# EAGLE board Qwiic_IMU_Bonobo (EAGLE 9.6.2)
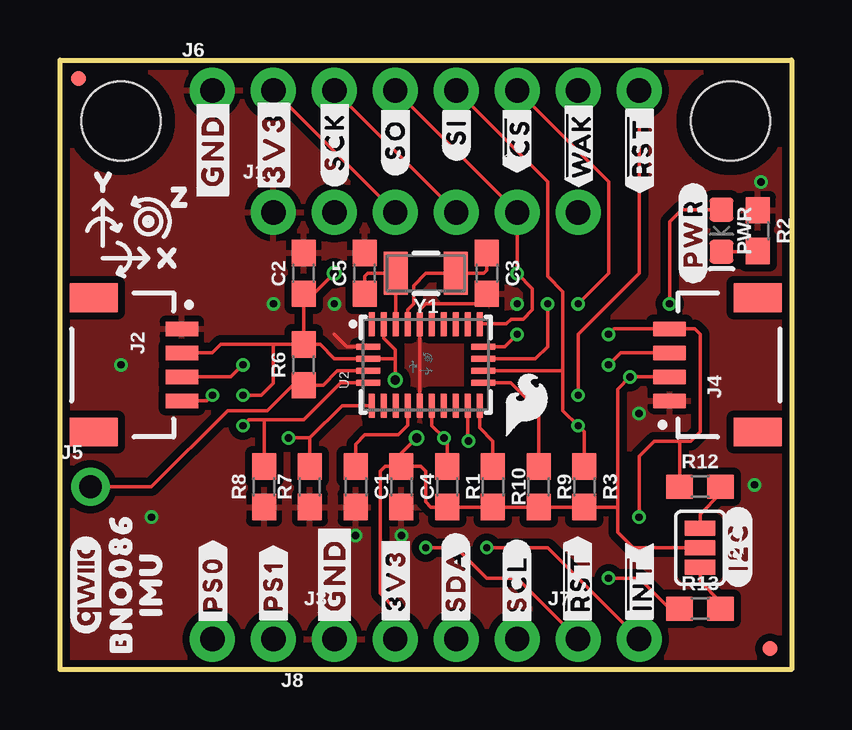
[diagram p0: board, top side]
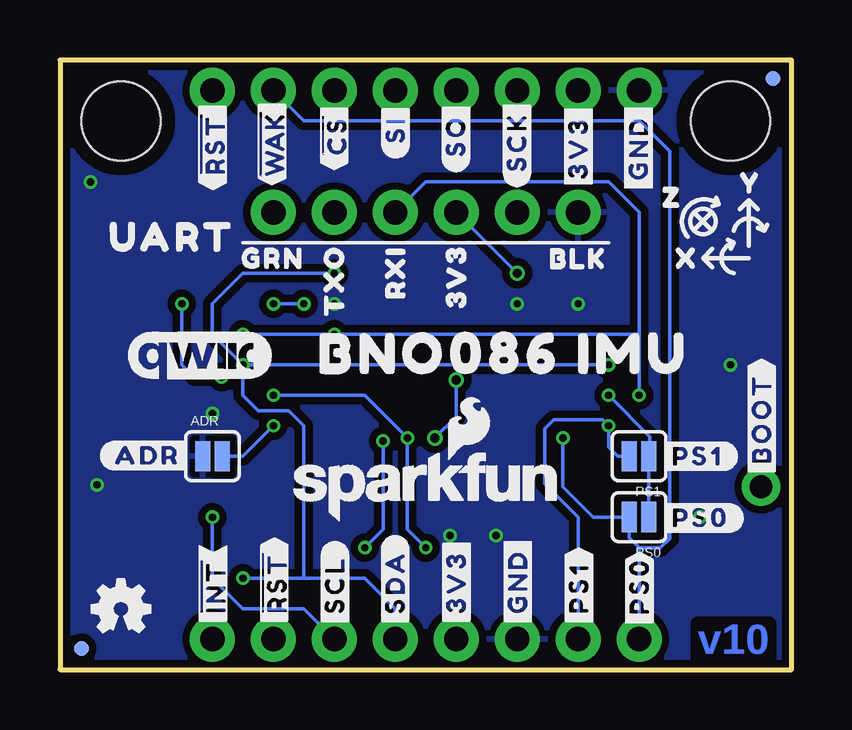
[diagram p1: board, bottom side, seen from below]

Size 30.48 x 25.4 mm. Coordinates in mm from the lower left corner, seen from the top.
Outline: 0,0 0,25.4 30.48,25.4 30.48,0 0,0
Copper layers (1*16): Top 0.035mm / dielectric 1.5mm / Bottom 0.035mm
Design rules "SparkFun-2-Layer-Minimum-JLCPCB": minimum track width 5mil, minimum drill 0.3mm, track to track 5mil, track to pad 5mil, pad to pad 5mil, via to via 5mil, smd to smd 5mil, copper to edge 7mil, drill to drill 7mil, minimum pad ring 5mil, minimum via ring 5mil, stop-mask expansion 2.5mil, vias tented up to drill 25mil, thermal gap 10mil

## Footprints (pad centres in the part's own frame; a part is rotated, then mirrored left to right if it is on the bottom)
SMT-JUMPER_2_NO_SILK = smd 0.635 x 1.27: 1 -0.406,0; 2 0.406,0
0603 = smd 1.1 x 1: 1 -0.85,0; 2 0.85,0
SMT-JUMPER_3_2-NC_PASTE_SILK = smd 0.635 x 1.27: 1 -0.813,0; 2 0,0; 3 0.813,0
1X06_NO_SILK = drill 1.016 pad 1.88: 1 0,0; 2 2.54,0; 3 5.08,0; 4 7.62,0; 5 10.16,0; 6 12.7,0
JST04_1MM_RA = smd 0.6 x 1.35: 1 -1.5,0; 2 -0.5,0; 3 0.5,0; 4 1.5,0 | smd 1.2 x 2: NC1 2.8,-3.675; NC2 -2.8,-3.675
1X04_NO_SILK = drill 1.016 pad 1.88: 1 0,0; 2 2.54,0; 3 5.08,0; 4 7.62,0
1X01_NO_SILK = drill 0.95 pad 1.6: 1 0,0
1X08_NO_SILK = drill 1.016 pad 1.88: 1 0,0; 2 2.54,0; 3 5.08,0; 4 7.62,0; 5 10.16,0; 6 12.7,0; 7 15.24,0; 8 17.78,0
1X02_NO_SILK = drill 1.016 pad 1.88: 1 0,0; 2 2.54,0
FIDUCIAL-MICRO = smd 0.635 x 0.635: 1 0,0
STAND-OFF = hole 3.302: 0,0
LED-0603 = smd 1 x 1: A -0.877,0; C 0.877,0
LGA-28 = smd 1 x 0.25: 1 1.7,2.25; 6 -1.7,2.25; 7 -1.7,1.75; 8 -1.7,1.25; 9 -1.7,0.75; 10 -1.7,0.25; 11 -1.7,-0.25; 12 -1.7,-0.75; 13 -1.7,-1.25; 14 -1.7,-1.75; 15 -1.7,-2.25; 20 1.7,-2.25; 21 1.7,-1.75; 22 1.7,-1.25; 23 1.7,-0.75; 24 1.7,-0.25; 25 1.7,0.25; 26 1.7,0.75; 27 1.7,1.25; 28 1.7,1.75 | smd 0.25 x 1: 2 0.75,2.4; 3 0.25,2.4; 4 -0.25,2.4; 5 -0.75,2.4; 16 -0.75,-2.4; 17 -0.25,-2.4; 18 0.25,-2.4; 19 0.75,-2.4
CRYSTAL-SMD-3.2X1.5MM = smd 1 x 1.8: P$1 -1.25,0; P$2 1.25,0

## Placement (x,y rotation side)
ADR  [SMT-JUMPER_2_NO_SILK]  24.13,8.89 0 bottom
C1  0.1uF  [0603]  12.32,7.62 270 top
C2  0.1uF  [0603]  10.16,16.51 90 top
C3  22pF  [0603]  17.78,16.51 270 top
C4  0.1uF  [0603]  14.22,7.62 270 top
C5  22pF  [0603]  12.7,16.51 90 top
FRAME1  FRAME-LETTER  [CREATIVE_COMMONS]  -12.7,-7.62 0 top  (outside the outline)
I2C  [SMT-JUMPER_3_2-NC_PASTE_SILK]  26.67,5.08 270 top
J1  [1X06_NO_SILK]  8.89,19.05 0 top
J2  SMD  [JST04_1MM_RA]  5.08,12.7 270 top
J3  PTH  [1X04_NO_SILK]  11.43,1.27 0 top
J4  SMD  [JST04_1MM_RA]  25.4,12.7 90 top
J5  [1X01_NO_SILK]  1.27,7.62 0 top
J6  SPI  [1X08_NO_SILK]  6.35,24.13 0 top
J7  [1X02_NO_SILK]  21.59,1.27 0 top
J8  [1X02_NO_SILK]  8.89,1.27 180 top
JP1  FIDUCIALUFIDUCIAL  [FIDUCIAL-MICRO]  29.59,0.89 0 bottom
JP2  FIDUCIALUFIDUCIAL  [FIDUCIAL-MICRO]  29.59,0.89 0 top
JP3  STAND-OFF  [STAND-OFF]  2.54,22.86 0 top
JP4  STAND-OFF  [STAND-OFF]  27.94,22.86 0 top
JP5  FIDUCIALUFIDUCIAL  [FIDUCIAL-MICRO]  0.76,24.64 0 bottom
JP6  FIDUCIALUFIDUCIAL  [FIDUCIAL-MICRO]  0.76,24.64 0 top
LOGO1  OSHW-LOGOMINI  [OSHW-LOGO-MINI]  27.94,2.54 0 bottom
LOGO2  REVISION  [REVISION]  -1.27,-10.16 0 top  (outside the outline)
LOGO4  SFE_LOGO_FLAME.1_INCH  [SFE_LOGO_FLAME_.1]  19.43,11.05 0 top
LOGO5  SFE_LOGO_NAME_FLAME.1_INCH  [SFE_LOGO_NAME_FLAME_.1]  15.18,7.64 0 bottom
PS0  [SMT-JUMPER_2_NO_SILK]  6.35,6.35 180 bottom
PS1  [SMT-JUMPER_2_NO_SILK]  6.35,8.89 180 bottom
PWR  RED  [LED-0603]  27.56,18.29 270 top
R1  10k  [0603]  16.13,7.62 270 top
R2  4.7k  [0603]  29.08,18.29 270 top
R3  10k  [0603]  21.84,7.62 270 top
R6  10k  [0603]  10.16,12.7 90 top
R7  10k  [0603]  10.41,7.62 90 top
R8  10k  [0603]  8.51,7.62 90 top
R9  4.7k  [0603]  19.94,7.62 270 top
R10  4.7k  [0603]  18.03,7.62 270 top
R12  2.2k  [0603]  26.67,7.62 0 top
R13  2.2k  [0603]  26.67,2.54 0 top
U2  BNO080  [LGA-28]  15.24,12.7 90 top
U$1  [#I2C#874]  28.26,5.11 90 top
U$2  [BLK889]  8.9,17.11 0 bottom
U$3  [X878]  4.51,17.13 0 top
U$4  [##INT##6]  24.1,3.45 90 bottom
U$5  [##RST##5]  21.55,3.61 90 bottom
U$6  [Y879]  1.86,20.3 0 top
U$7  [Z880]  5.02,19.68 0 top
U$8  [#SCL#4]  19.02,3.52 90 bottom
U$9  [#GND#2]  11.4,3.66 90 bottom
U$10  [Y879]  1.7,20.27 0 bottom
U$11  [#SCK#882]  11.44,21.97 90 bottom
U$12  [#SO#867]  13.98,22.1 90 top
U$13  [#SI#868]  16.52,22.4 90 top
U$14  [#SDA#3]  16.51,3.64 90 bottom
U$15  [Z880]  4.97,19.67 0 bottom
U$16  [#GND#2]  6.37,21.73 90 bottom
U$17  [##CS##870]  19.05,22.16 90 top
U$18  [##CS##885]  19.05,22.25 90 bottom
U$19  [##RST##872]  24.14,21.76 90 top
U$20  [##RST##887]  24.12,21.88 90 bottom
U$21  [RXI891]  16.5,16.54 90 bottom
U$22  [TXO892]  19.05,16.22 90 bottom
U$23  [#PS0#874]  6.37,3.56 90 top
U$24  [BNO0861]  2.55,3.59 90 top
U$25  [X878]  4.36,17.13 0 bottom
U$27  [#3V3#874]  13.96,3.64 90 bottom
U$29  [QWIIC_4MM]  1.09,3.53 90 top
U$30  [#ADR#894]  26.84,8.92 0 bottom
U$31  [IMU862]  3.78,3.57 90 top
U$32  [#GND#864]  6.37,21.64 90 top
U$33  [#PS1#1]  8.86,3.39 90 bottom
U$34  [#PS0#2]  6.33,3.47 90 bottom
U$35  [#PS1#895]  3.92,8.89 0 bottom
U$36  [#3V3#865]  8.92,21.73 90 top
U$37  [#SCK#866]  11.45,21.99 90 top
U$38  [##WAK##871]  21.61,22.01 90 top
U$39  [#3V3#882]  8.88,21.73 90 bottom
U$40  [3V3891]  13.96,16.38 90 bottom
U$41  [GRN890]  21.62,17.13 0 bottom
U$42  [#PWR#873]  26.38,18.18 90 top
U$43  [#PS1#874]  8.89,3.47 90 top
U$44  [UART881]  25.81,18.01 0 bottom
U$45  [#GND#864]  11.44,3.95 90 top
U$46  [#3V3#874]  13.99,3.71 90 top
U$47  [#SDA#874]  16.49,3.72 90 top
U$48  [#SCL#875]  19.04,3.58 90 top
U$49  [#BOOT#888]  1.24,10.45 90 bottom
U$50  [##RST##876]  21.57,3.66 90 top
U$51  [##INT##877]  24.14,3.54 90 top
U$52  [QWIIC_6MM]  24.61,13.08 0 bottom
U$53  [##WAK##886]  21.64,21.83 90 bottom
U$54  [BNO086_IMU881]  12.01,13.16 0 bottom
U$55  [#SO#883]  13.99,22.23 90 bottom
U$56  [#SI#884]  16.49,22.49 90 bottom
U$57  [#PS0#895]  3.79,6.32 0 bottom
U$59  [ORDERING_INSTRUCTIONS]  45.72,54.61 0 top  (outside the outline)
Y1  32.768kHz  [CRYSTAL-SMD-3.2X1.5MM]  15.24,16.51 180 top

## Library data of the parts
ADR I2C PS0 PS1 = SparkFun-Jumpers
C1 C2 C4 = SparkFun-Capacitors; PROD_ID: CAP-00810
C3 C5 = SparkFun-Capacitors; PROD_ID: CAP-07876
FRAME1 JP1 JP2 JP5 JP6 LOGO1 LOGO2 LOGO4 LOGO5 U$29 U$52 U$59 = SparkFun-Aesthetics
J1 = SparkFun-Connectors; PROD_ID: CONN-08437
J2 J4 = SparkFun-Connectors; PROD_ID: CONN-13694
J3 J5 J7 J8 = SparkFun-Connectors
J6 = SparkFun-Connectors; PROD_ID: CONN-08438
JP3 JP4 = SparkFun-Hardware
PWR = SparkFun-LED; PROD_ID: DIO-17976
R1 R3 R6-R8 = SparkFun-Resistors; PROD_ID: RES-00824
R2 R9 R10 = SparkFun-Resistors; PROD_ID: RES-07857
R12 R13 = SparkFun-Resistors; PROD_ID: RES-08272
U2 = SparkFun-IC-Special-Function; PROD_ID: SEN-13947
U$1-U$25 U$27 U$30-U$51 U$53-U$57 = output
Y1 = SparkFun-Clocks; PROD_ID: XTAL-13062

## Nets
3.3V: C2.1 C4.1 I2C.2 J1.3 J2.2 J3.2 J4.2 J6.2 PS0.1 PS1.1 PWR.A R1.2 R3.2 R6.2 R9.2 R10.2 U2.3 U2.28
!BOOT: J5.1 R6.1 U2.4
!CS: J6.6 U2.18
!INT: J7.2 U2.14
!RST: J6.8 J7.1 R1.1 U2.11
ADDR/MOSI: ADR.2 J6.5 R3.1 U2.17
CAP: C1.1 U2.9
GND: ADR.1 C1.2 C2.2 C3.2 C4.2 C5.2 J1.1 J2.1 J3.1 J4.1 J6.1 R2.1 R7.1 R8.1 U2.2 U2.10 U2.25
N$1: C5.1 U2.27 Y1.P$2
N$2: C3.1 U2.26 Y1.P$1
N$3: PWR.C R2.2
PS0/WAKE: J6.7 J8.2 PS0.2 R7.2 U2.6
PS1: J8.1 PS1.2 R8.2 U2.5
S_SCL: R10.1 U2.15
S_SDA: R9.1 U2.16
SCL/SCK/RX: J1.4 J2.4 J3.4 J4.4 J6.3 R12.1 U2.19
SCL_PU: I2C.1 R12.2
SDA/MISO/TX: J1.5 J2.3 J3.3 J4.3 J6.4 R13.1 U2.20
SDA_PU: I2C.3 R13.2

## Tracks (layer width: path | path; a pad name or v marks a point on that pad's centre or on a via)
3.3V  (via drill 0.3, 0.38)
  Top 0.152: U2.3 11.43,12.95 10.83,13.55 R6.2 | U2.28 13.49,13.81 13.97,13.34 13.97,12.95 | U2.3 | R6.2 8.89,13.55 | 8.89,13.55 6.69,13.55 6.35,13.21 J2.2 | J3.2 13.97,2.54 13.34,3.17 13.34,8.26 13.55,8.47 C4.1 | J4.2 v23.76,12.2 v23.75,12.19 23.24,11.68 23.24,6.73 | 23.24,6.73 23.24,5.71 23.88,5.08 I2C.2 | 23.24,6.73 23.2,6.77 R3.2 R9.2 R10.2 R1.2 15.46,6.77 15.24,6.99 15.24,8.26 15.03,8.47 C4.1 | v7.62,11.43 8.38,11.43 8.89,11.94 8.89,13.55 | J6.2 J1.3 | R6.2 C2.1 10.58,15.66 v11.43,16.51 | C4.1 14.22,9.02 v14.86,9.65 | 13.97,12.95 v13.97,12.06 | U2.3 13.97,12.95 | PWR.A 25.9,19.16 25.4,18.67 v25.4,15.24
  Bottom 0.152: PS0.1 PS1.1 5.9,9.71 v7.62,11.43 | J1.3 v11.43,16.51 | v14.86,9.65 13.97,10.54 v13.97,12.06 | v23.75,12.19 24.89,12.19 25.4,12.7 v25.4,15.24
!BOOT
  Top 0.152: U2.4 11.56,12.45 10.96,11.85 R6.1 9.69,11.85 8.64,10.79 6.99,10.79 3.81,7.62 J5.1
!CS  (via drill 0.3)
  Top 0.152: v21.59,15.24 22.86,16.51 22.86,20.32 J6.6 | U2.18 19.81,12.95 20.32,13.46 v20.32,15.24
  Bottom 0.152: v21.59,15.24 v20.32,15.24
!INT  (via drill 0.3)
  Top 0.152: U2.14 16.99,9.55 v17.02,9.53 | v17.78,5.08 20.32,5.08 J7.2
  Bottom 0.152: v17.02,9.53 17.02,5.84 v17.78,5.08
!RST  (via drill 0.3)
  Top 0.152: U2.11 15.49,10.16 v16,9.65 16.13,9.53 R1.1 | J6.8 24.13,16.51 21.59,13.97 v21.59,11.43 | v15.24,5.08 16.51,5.08 17.78,3.81 19.05,3.81 J7.1
  Bottom 0.152: v15.24,5.08 16,5.84 v16,9.65 17.78,11.43 v21.59,11.43
ADDR/MOSI  (via drill 0.3)
  Top 0.152: 20.95,12.45 20.95,15.75 20.32,16.38 20.32,20.32 J6.5 | 20.95,12.45 20.95,10.79 v21.59,10.16 21.84,9.91 R3.1 | U2.17 20.95,12.45
  Bottom 0.152: ADR.2 22.86,8.89 v21.59,10.16
CAP
  Top 0.152: U2.9 14.49,10.17 14.1,9.78 12.7,9.78 12.32,9.4 C1.1
GND  (via drill 0.3)
  Top 0.152: U2.2 11.95,13.45 11.43,13.97 | C3.2 17.36,15.24 15.24,15.24 14.99,14.99 U2.25 U2.10
  other vias: 24.13,10.67 14.22,5.59 12.32,5.59 2.54,12.7 28.94,7.7 3.81,6.35 8.89,15.24 19.05,15.24 11.43,15.24 29.21,20.32
  pour Bottom (isolate 0.305): 0,0 0,25.4 30.48,25.4 30.48,0
  pour Top (isolate 0.305): 0,0 0,25.4 30.48,25.4 30.48,0
N$1
  Top 0.152: U2.27 Y1.P$2 12.83,16.51 12.7,16.38 C5.1
N$2
  Top 0.152: C3.1 17.78,16.64 17.65,16.51 Y1.P$1 15.24,16.51 14.73,16 14.73,15.24 14.49,15 U2.26
N$3
  Top 0.152: PWR.C 29.06,17.41 R2.2
PS0/WAKE  (via drill 0.3)
  Top 0.152: U2.6 11.76,11 10.41,9.65 | 10.41,9.65 R7.2 | 10.41,9.65 v9.53,9.65
  Bottom 0.152: v9.53,9.65 9.53,7.62 8.26,6.35 PS0.2 6.76,5.49 6.35,5.08 | J6.7 20.32,22.86 6.35,22.86 5.08,21.59 5.08,5.46 5.46,5.08 6.35,5.08 | 6.35,5.08 J8.2
PS1  (via drill 0.3)
  Top 0.152: U2.5 11.7,11.95 10.16,10.41 8.51,10.41 | 8.51,10.41 7.87,10.41 v7.62,10.16 | R8.2 8.51,10.41
  Bottom 0.152: PS1.2 7.24,8.89 7.62,9.27 v7.62,10.16 7.87,10.41 9.91,10.41 10.29,10.03 10.29,7.75 8.89,6.35 J8.1
S_SCL
  Top 0.152: U2.15 17.49,10.07 18.03,9.53 R10.1
S_SDA
  Top 0.152: U2.16 18.78,11.95 19.94,10.79 R9.1
SCL/SCK/RX  (via drill 0.3)
  Top 0.152: U2.19 18.53,13.45 v19.05,13.97 | v22.86,13.97 23.09,14.2 J4.4 26.44,14.2 26.67,13.97 26.67,9.91 26.29,9.53 25.78,9.53 | J2.4 6.12,11.2 v6.35,11.43 | 25.78,9.53 24.77,9.53 24.13,8.89 v24.13,6.35 | J6.3 J1.4 | R12.1 25.82,9.49 25.78,9.53
  Bottom 0.152: v22.86,13.97 v19.05,13.97 6.35,13.97 | J3.4 20.32,2.54 22.86,2.54 24.13,3.81 v24.13,6.35 | 6.35,13.97 6.35,19.05 7.62,20.32 15.24,20.32 J1.4 | 6.35,13.97 v6.35,11.43
SCL_PU
  Top 0.152: I2C.1 26.67,6.48 27.52,7.33 R12.2
SDA/MISO/TX  (via drill 0.3)
  Top 0.152: J2.3 7.12,12.2 v7.62,12.7 | J4.3 23.36,13.2 v22.86,12.7 | J6.4 J1.5 v19.05,16.51 19.68,15.88 19.68,14.99 19.3,14.61 18.8,14.61 18.59,14.4 U2.20 | v22.86,3.81 24.13,3.81 25.4,2.54 R13.1
  Bottom 0.152: v19.05,16.51 22.86,16.51 24.13,15.24 24.13,13.97 v22.86,12.7 | J3.3 16.51,2.54 17.78,3.81 20.32,3.81 | v22.86,3.81 20.32,3.81 | v7.62,12.7 v22.86,12.7 | v22.86,12.7 22.86,11.43 22.23,10.79 20.95,10.79 20.32,10.16 20.32,3.81
SDA_PU
  Top 0.152: I2C.3 26.67,3.68 27.52,2.83 R13.2

## Text on the board
Bottom: v10
tDocu: Soldermask: Red / Thickness: 1.6mm / 2-Layer Design / 1oz copper / Finish: HASL | N. Seidle | A. England
Muster: Measure Units: INCHES